# Altium PCB WIC-SWITCH-ESP32-POWER-CON.PcbDoc
Units mm, origin at the board's own origin, x right, y up, seen from the top; angles counter-clockwise.
Board outline 65 x 64 mm, 4 copper layers (Top Side, Inner Layer 1, Inner Layer 2, Bottom Side), stack 0.99 mm thick; 101 components, 46 nets, 310 pads, 0 vias.
Unrouted connection lines stored in the file: 201.
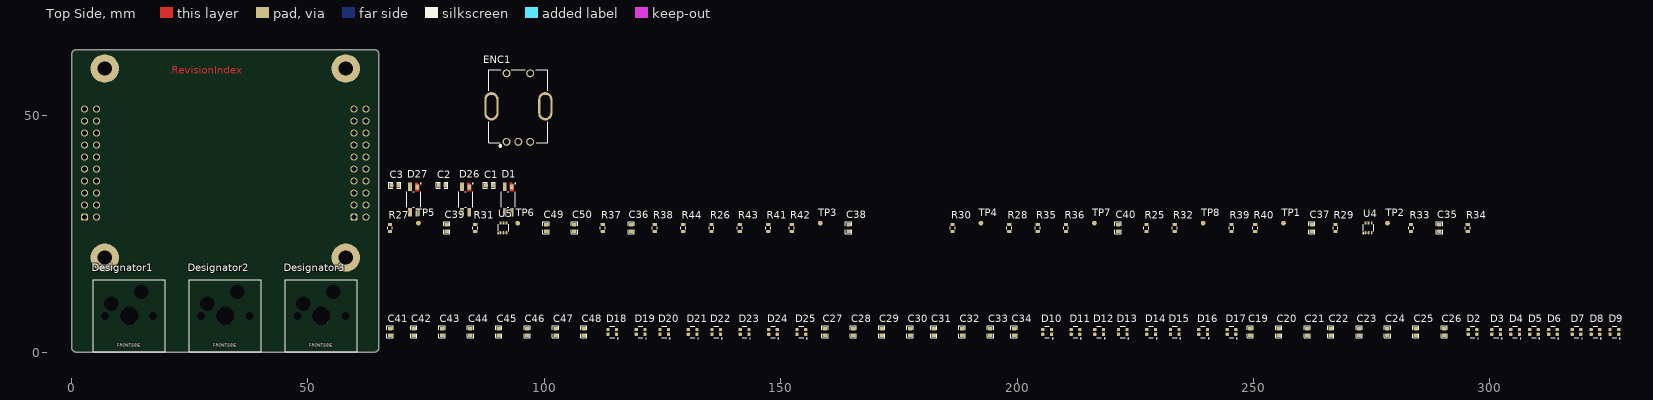
[diagram p0: Top Side view]
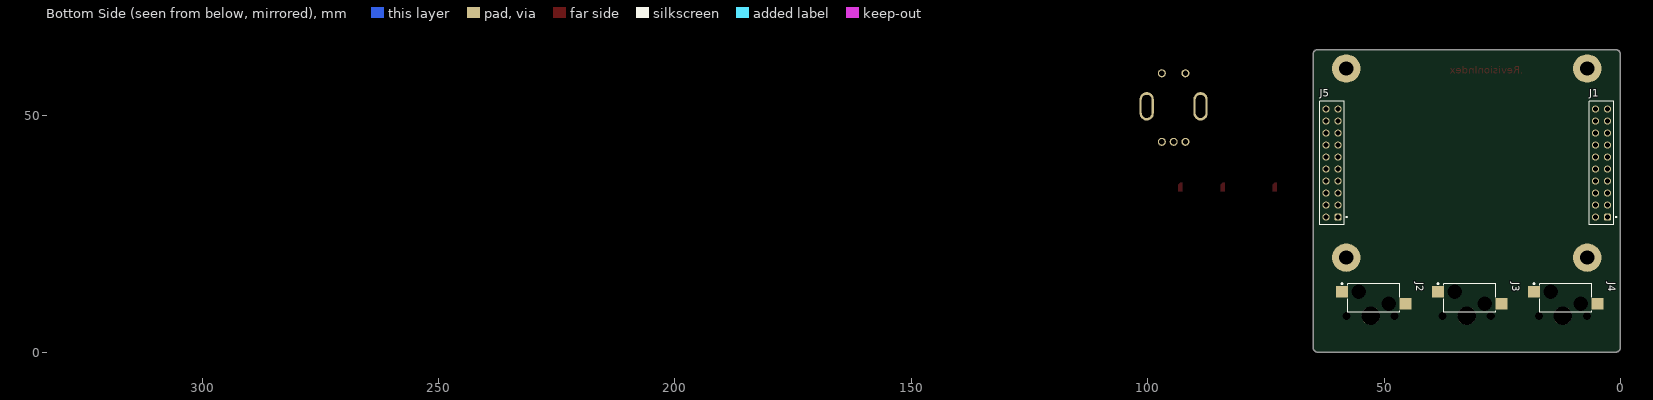
[diagram p1: Bottom Side view, seen from below]

## Layer stack, top to bottom
Top Solder: solder mask 0.015, WE-SM-0001, Dk 3.5
Top Side: signal copper 0.035
Dielectric 1: prepreg 0.22, WE-PP-0010, Dk 3.9
Inner Layer 1: signal copper 0.035
Core 1: core 0.41, WE-CO-0009, Dk 4.3
Inner Layer 2: signal copper 0.035
Dielectric 2: prepreg 0.22, WE-PP-0010, Dk 3.9
Bottom Side: signal copper 0.035
Bottom Solder: solder mask 0.015, WE-SM-0001, Dk 3.5

## Board outline
0,1 0,63 cw(c1,63) 1,64 64,64 cw(c64,63) 65,63 65,1 cw(c64,1) 64,0 1,0 cw(c1,1)

## Design rules (kind name [scope] priority, off if disabled: settings)
AssemblyTestPointUsage [All] p1: isadvanced=TRUE
AssemblyTestpoint [All] p1: isadvanced=TRUE testpointundercomponent=TRUE minsize=1.016 maxsize=2.54 preferedsize=1.524 minholesize=0 maxholesize=1.016 preferedholesize=0.813 testpointgrid=0.025 usegrid=TRUE gridtolerance=0 allowsidetop=TRUE allowsidebottom=TRUE
Clearance [All] p1: gap=0.254 ignorepadtopadclearanceinfootprint=FALSE ismatrix=TRUE
ComponentClearance [All] p1: isadvanced=TRUE gap=0.254 collisioncheckmode=3 verticalgap=0.254 showdistances=FALSE
FabricationTestPointUsage [All] p1: isadvanced=TRUE valid=0 allowmultiple=FALSE
FabricationTestpoint [All] p1: isadvanced=TRUE side=3 testpointundercomponent=TRUE minsize=1.016 maxsize=2.54 preferedsize=1.524 minholesize=0 maxholesize=1.016 preferedholesize=0.813 testpointgrid=0.025 allowsidetop=TRUE allowsidebottom=TRUE usegrid=TRUE gridtolerance=0
FanoutControl Fanout_BGA [IsBGA] p1: isadvanced=TRUE bgadir=Out bgaviamode=Centered fanoutstyle=Auto fanoutdirection=Alternating viagrid=0.025 // Fanout_BGA (Default Rule)
FanoutControl Fanout_LCC [IsLCC] p2: isadvanced=TRUE bgadir=Out bgaviamode=Centered fanoutstyle=Auto fanoutdirection=Alternating viagrid=0.025 // Fanout_LCC (Default Rule)
FanoutControl Fanout_SOIC [IsSOIC] p3: isadvanced=TRUE bgadir=Out bgaviamode=Centered fanoutstyle=Auto fanoutdirection=Alternating viagrid=0.025 // Fanout_SOIC (Default Rule)
FanoutControl Fanout_Small [(CompPinCount < 5)] p4: isadvanced=TRUE bgadir=Out bgaviamode=Centered fanoutstyle=Auto fanoutdirection=OutThenIn viagrid=0.025 // Fanout_Small (Default Rule)
FanoutControl Fanout_Default [All] p5: isadvanced=TRUE bgadir=Out bgaviamode=Centered fanoutstyle=Auto fanoutdirection=Alternating viagrid=0.025 // Fanout_Default (Default Rule)
Height [All] p1: isadvanced=TRUE minheight=0 maxheight=25.4 prefheight=12.7
HoleSize [All] p1: isadvanced=TRUE absolutevalues=TRUE maxlimit=3 minlimit=0.025 maxpercent=80.000 minpercent=20.000
HoleToHoleClearance [All] p1: isadvanced=TRUE gap=0.15 allowstackedmicrovias=TRUE
LayerPairs [All] p1: isadvanced=TRUE enforce=TRUE
MinimumSolderMaskSliver [All] p1: isadvanced=TRUE minsoldermaskwidth=0.1
NetAntennae [All] p1: isadvanced=TRUE netantennaetolerance=0
PasteMaskExpansion [All] p1: isadvanced=TRUE expansion=0 percent=-10.000000
PlaneClearance [All] p1: isadvanced=TRUE clearance=0.508
PlaneConnect [All] p1: isadvanced=TRUE planeconnectstyle=Relief reliefexpansion=0.508 reliefentries=4 reliefconductorwidth=0.254 reliefairgap=0.254
PolygonConnect [All] p1: connectstyle=Relief reliefconductorwidth=0.254 reliefentries=4 polygonreliefangle="90 Angle" airgapwidth=0.254
RoutingCorners [All] p1: isadvanced=TRUE cornerstyle=45-Degree minsetback=2.54 maxsetback=2.54
RoutingPriority [All] p1: isadvanced=TRUE routingpriority=0
RoutingVias [All] p1: holewidth=0.711 width=1.27 viastyle="Through Hole" minholewidth=0.711 minwidth=1.27 maxholewidth=0.711 maxwidth=1.27
ShortCircuit [All] p1: isadvanced=TRUE allowed=FALSE
SilkToSilkClearance [All] p1: isadvanced=TRUE silktosilkclearance=0.15
SilkToSolderMaskClearance [IsPad] p1: isadvanced=TRUE minsilkscreentomaskgap=0.15 clearancetoexposedcopper=TRUE
SolderMaskExpansion [All] p1: isadvanced=TRUE expansion=0.05 istentingtop=FALSE useseparateexpansions=TRUE expansionbottom=0.05 istentingbottom=FALSE
SupplyNets "Schematic Supply Nets_4" [InNet('5V_LEDS')] p1: voltage=0.000
SupplyNets "Schematic Supply Nets_2" [InNet('GND')] p2: isadvanced=TRUE voltage=0.000
SupplyNets "Schematic Supply Nets_1" [InNet('3V3')] p3: isadvanced=TRUE voltage=0.000
UnRoutedNet [All] p1: isadvanced=TRUE
UnpouredPolygon [All] p1: isadvanced=TRUE
Width [All] p1: maxlimit=0.254 minlimit=0.254 preferedwidth=0.254
4 further rules are at their usual default settings.

## Classes and differential pairs
component class B2B-CONNECTOR: J1 J5
component class "LEDs PUSH BUTTONS": C19 C20 C21 C22 C23 C24 C25 C26 C27 C28 C29 C30 C31 C32 C33 C34 C41 C42 C43 C44 C45 C46 C47 C48 D2 D3 D4 D5 D6 D7 D8 D9 D10 D11 D12 D13 D14 D15 D16 D17 D18 D19 D20 D21 D22 D23 D24 D25
component class "PUSH-BUTTON & ENCODER": C1 C2 C3 C35 C36 C37 C38 C39 C40 C49 C50 D1 D26 D27 ENC1 J2 J3 J4 R25 R26 R27 R28 R29 R30 R31 R32 R33 R34 R35 R36 R37 R38 R39 R40 R41 R42 R43 R44 S1 S2 S3 TP1 TP2 TP3 TP4 TP5 TP6 TP7 TP8 U4 U5

## Components (designator, comment, footprint, x,y, rotation, side; value= is the part's Value field where it differs from the comment)
C1 "C0603C104K5RACTU" CAPC0603X37L 88.362,35.293 r0 top value=100nF
C2 "C0603C104K5RACTU" CAPC0603X37L 78.362,35.293 r0 top value=100nF
C3 "C0603C104K5RACTU" CAPC0603X37L 68.362,35.293 r0 top value=100nF
C19 "C0603C104K5RACTU" CAPC0603X37L 249.362,4.293 r90 top value=100nF
C20 "C0603C104K5RACTU" CAPC0603X37L 255.362,4.293 r90 top value=100nF
C21 "C0603C104K5RACTU" CAPC0603X37L 261.362,4.293 r90 top value=100nF
C22 "C0603C104K5RACTU" CAPC0603X37L 266.362,4.293 r90 top value=100nF
C23 "C0603C104K5RACTU" CAPC0603X37L 272.362,4.293 r90 top value=100nF
C24 "C0603C104K5RACTU" CAPC0603X37L 278.362,4.293 r90 top value=100nF
C25 "C0603C104K5RACTU" CAPC0603X37L 284.362,4.293 r90 top value=100nF
C26 "C0603C104K5RACTU" CAPC0603X37L 290.362,4.293 r90 top value=100nF
C27 "C0603C104K5RACTU" CAPC0603X37L 159.362,4.293 r90 top value=100nF
C28 "C0603C104K5RACTU" CAPC0603X37L 165.362,4.293 r90 top value=100nF
C29 "C0603C104K5RACTU" CAPC0603X37L 171.362,4.293 r90 top value=100nF
C30 "C0603C104K5RACTU" CAPC0603X37L 177.362,4.293 r90 top value=100nF
C31 "C0603C104K5RACTU" CAPC0603X37L 182.362,4.293 r90 top value=100nF
C32 "C0603C104K5RACTU" CAPC0603X37L 188.362,4.293 r90 top value=100nF
C33 "C0603C104K5RACTU" CAPC0603X37L 194.362,4.293 r90 top value=100nF
C34 "C0603C104K5RACTU" CAPC0603X37L 199.362,4.293 r90 top value=100nF
C35 "C0603C104K5RACTU" CAPC0603X37L 289.362,26.293 r90 top value=100nF
C36 "C0603C104K5RACTU" CAPC0603X37L 118.362,26.293 r90 top value=100nF
C37 "C0603C104K5RACTU" CAPC0603X37L 262.362,26.293 r90 top value=100nF
C38 "C0603C104K5RACTU" CAPC0603X37L 164.362,26.293 r90 top value=100nF
C39 "C0603C104K5RACTU" CAPC0603X37L 79.362,26.293 r90 top value=100nF
C40 "C0603C104K5RACTU" CAPC0603X37L 221.362,26.293 r90 top value=100nF
C41 "C0603C104K5RACTU" CAPC0603X37L 67.362,4.293 r90 top value=100nF
C42 "C0603C104K5RACTU" CAPC0603X37L 72.362,4.293 r90 top value=100nF
C43 "C0603C104K5RACTU" CAPC0603X37L 78.362,4.293 r90 top value=100nF
C44 "C0603C104K5RACTU" CAPC0603X37L 84.362,4.293 r90 top value=100nF
C45 "C0603C104K5RACTU" CAPC0603X37L 90.362,4.293 r90 top value=100nF
C46 "C0603C104K5RACTU" CAPC0603X37L 96.362,4.293 r90 top value=100nF
C47 "C0603C104K5RACTU" CAPC0603X37L 102.362,4.293 r90 top value=100nF
C48 "C0603C104K5RACTU" CAPC0603X37L 108.362,4.293 r90 top value=100nF
C49 "C0603C103K5RACTU" CAPC0603X37L 100.362,26.293 r90 top value=10nF
C50 "C0603C103K5RACTU" CAPC0603X37L 106.362,26.293 r90 top value=10nF
D1 "SK6812MINI-E-012" OPSCO_SK6812MINI-E-012 92.362,32.293 r90 top value=SK6812MINI-E
D2 "WS2812B-2020" WS2812B-2020 296.362,4.293 r0 top
D3 "WS2812B-2020" WS2812B-2020 301.362,4.293 r0 top
D4 "WS2812B-2020" WS2812B-2020 305.362,4.293 r0 top
D5 "WS2812B-2020" WS2812B-2020 309.362,4.293 r0 top
D6 "WS2812B-2020" WS2812B-2020 313.362,4.293 r0 top
D7 "WS2812B-2020" WS2812B-2020 318.362,4.293 r0 top
D8 "WS2812B-2020" WS2812B-2020 322.362,4.293 r0 top
D9 "WS2812B-2020" WS2812B-2020 326.362,4.293 r0 top
D10 "WS2812B-2020" WS2812B-2020 206.362,4.293 r0 top
D11 "WS2812B-2020" WS2812B-2020 212.362,4.293 r0 top
D12 "WS2812B-2020" WS2812B-2020 217.362,4.293 r0 top
D13 "WS2812B-2020" WS2812B-2020 222.362,4.293 r0 top
D14 "WS2812B-2020" WS2812B-2020 228.362,4.293 r0 top
D15 "WS2812B-2020" WS2812B-2020 233.362,4.293 r0 top
D16 "WS2812B-2020" WS2812B-2020 239.362,4.293 r0 top
D17 "WS2812B-2020" WS2812B-2020 245.362,4.293 r0 top
D18 "WS2812B-2020" WS2812B-2020 114.362,4.293 r0 top
D19 "WS2812B-2020" WS2812B-2020 120.362,4.293 r0 top
D20 "WS2812B-2020" WS2812B-2020 125.362,4.293 r0 top
D21 "WS2812B-2020" WS2812B-2020 131.362,4.293 r0 top
D22 "WS2812B-2020" WS2812B-2020 136.362,4.293 r0 top
D23 "WS2812B-2020" WS2812B-2020 142.362,4.293 r0 top
D24 "WS2812B-2020" WS2812B-2020 148.362,4.293 r0 top
D25 "WS2812B-2020" WS2812B-2020 154.362,4.293 r0 top
D26 "SK6812MINI-E-012" OPSCO_SK6812MINI-E-012 83.362,32.293 r90 top value=SK6812MINI-E
D27 "SK6812MINI-E-012" OPSCO_SK6812MINI-E-012 72.362,32.293 r90 top value=SK6812MINI-E
Designator1 "Comment" KAILH_SWITCH_MX_COMPATIBEL 12.18,7.69 r0 top locked
Designator2 "Comment" KAILH_SWITCH_MX_COMPATIBEL 32.5,7.69 r0 top locked
Designator3 "Comment" KAILH_SWITCH_MX_COMPATIBEL 52.82,7.69 r0 top locked
ENC1 "PEC11R-4220K-S0024" PEC11R-4220K-S0024 94.5,52 r0 top value=PEC11R
J1 "61302021821" 61302021821 4,40 r90 bottom
J2 "CPG151101S11-16" KAILH_CPG151101S11-16 52.185,11.5 r180 bottom locked value=CPG151101S11
J3 "CPG151101S11-16" KAILH_CPG151101S11-16 31.865,11.5 r180 bottom locked value=CPG151101S11
J4 "CPG151101S11-16" KAILH_CPG151101S11-16 11.545,11.5 r180 bottom locked value=CPG151101S11
J5 "61302021821" 61302021821 61,40 r90 bottom
R25 "RC0603FR-070RL" RESC0603X21L 227.362,26.293 r90 top value=0
R26 "RC0603FR-070RL" RESC0603X21L 135.362,26.293 r90 top value=0
R27 "RC0603FR-070RL" RESC0603X21L 67.362,26.293 r90 top value=0
R28 "RC0603FR-070RL" RESC0603X21L 198.362,26.293 r90 top value=0
R29 "RC0603FR-070RL" RESC0603X21L 267.362,26.293 r90 top value=0
R30 "RC0603FR-070RL" RESC0603X21L 186.362,26.293 r90 top value=0
R31 "RC0603FR-070RL" RESC0603X21L 85.362,26.293 r90 top value=0
R32 "RC0603FR-070RL" RESC0603X21L 233.362,26.293 r90 top value=0
R33 "RC0603FR-0733KL" RESC0603X21L 283.362,26.293 r90 top value=10k
R34 "RC0603FR-0733KL" RESC0603X21L 295.362,26.293 r90 top value=10k
R35 "RC0603FR-0733KL" RESC0603X21L 204.362,26.293 r90 top value=10k
R36 "RC0603FR-0733KL" RESC0603X21L 210.362,26.293 r90 top value=10k
R37 "RC0603FR-0733KL" RESC0603X21L 112.362,26.293 r90 top value=10k
R38 "RC0603FR-0733KL" RESC0603X21L 123.362,26.293 r90 top value=10k
R39 "RC0603FR-0733KL" RESC0603X21L 245.362,26.293 r90 top value=10k
R40 "RC0603FR-0733KL" RESC0603X21L 250.362,26.293 r90 top value=10k
R41 "RC0603FR-0733KL" RESC0603X21L 147.362,26.293 r90 top value=10k
R42 "RC0603FR-0733KL" RESC0603X21L 152.362,26.293 r90 top value=10k
R43 "RC0603FR-0733KL" RESC0603X21L 141.362,26.293 r90 top value=10k
R44 "RC0603FR-0733KL" RESC0603X21L 129.362,26.293 r90 top value=10k
TP1 "SMD-Testpoint" "SMT-1.00mm Testpoint" 256.362,27.293 r90 top
TP2 "SMD-Testpoint" "SMT-1.00mm Testpoint" 278.362,27.293 r90 top
TP3 "SMD-Testpoint" "SMT-1.00mm Testpoint" 158.362,27.293 r90 top
TP4 "SMD-Testpoint" "SMT-1.00mm Testpoint" 192.362,27.293 r90 top
TP5 "SMD-Testpoint" "SMT-1.00mm Testpoint" 73.362,27.293 r90 top
TP6 "SMD-Testpoint" "SMT-1.00mm Testpoint" 94.362,27.293 r90 top
TP7 "SMD-Testpoint" "SMT-1.00mm Testpoint" 216.362,27.293 r90 top
TP8 "SMD-Testpoint" "SMT-1.00mm Testpoint" 239.362,27.293 r90 top
U4 "SN74LVC2G17DCKR" SOT23-6P65_200X210X110L36X22L 274.362,26.293 r0 top value=SN74LVC2G17
U5 "SN74LVC2G17DCKR" SOT23-6P65_200X210X110L36X22L 91.362,26.293 r0 top value=SN74LVC2G17

## Footprints (in the part's own frame and the unit in brackets; to place one, negate y for a bottom-side part, rotate by r counter-clockwise, add the part's x,y. Pads: shape width x height; smd on the part's side, far side on the other; paste and mask are expansions set on the pad)
61302021821 [mm] "Socket Header, Pitch 2.54 mm, THT, Vertical, dual row, 20p"
  rrect50% 1.5x1.5 hole 1.02: 1(-11.43,-1.27)
  round 1.5 hole 1.02: 2(-11.43,1.27) 3(-8.89,-1.27) 4(-8.89,1.27) 5(-6.35,-1.27) 6(-6.35,1.27) 7(-3.81,-1.27) 8(-3.81,1.27) 9(-1.27,-1.27) 10(-1.27,1.27) 11(1.27,-1.27) 12(1.27,1.27) 13(3.81,-1.27) 14(3.81,1.27) 15(6.35,-1.27) 16(6.35,1.27) 17(8.89,-1.27) 18(8.89,1.27) 19(11.43,-1.27) 20(11.43,1.27)
  silkscreen extent -13.08,-3.22 13.08,2.62, body extent -12.95,-2.54 12.95,2.54, height 8.45
CAPC0603X37L [mm] "Capacitor, Chip; 0603; 1.60 mm L X 0.80 mm W X 0.95 mm H body"
  rrect27% 0.75x0.95 smd: 1(-0.7,0) 2(0.7,0)
  silkscreen extent -1.25,-0.65 1.25,0.65, body extent -0.8,-0.4 0.8,0.4, height 0.95
KAILH_CPG151101S11-16 [mm] "Switch; 2 pin, 10.90 mm L X 5.89 mm W X 1.95 mm H body"
  rect 2.55x2.5 smd: 1(-6.725,1.27) 2(6.725,-1.27)
  round 1 hole 3 unplated paste-2539.97 mask+0: M1(-3.175,1.27) M2(3.175,-1.27)
  silkscreen extent -6.88,-3.01 5.51,3.15, body extent -7.25,-2.95 7.25,2.94, height 1.86
KAILH_SWITCH_MX_COMPATIBEL [mil] "Switch; 2 pin; MX Compatible"
  round 50 hole 67 unplated paste-99999 mask+0: 1(-200,0) 3(200,0)
  round 150 hole 157 unplated paste-99999 mask+0: 2(0,0)
  silkscreen extent -300,-300 300,300, body extent -275,-308 275,306, height 601
OPSCO_SK6812MINI-E-012 [mm] "LED; 4 pin, 3.20 mm L X 2.80 mm W X 1.04 mm H body"
  rect 0.98x0.82 smd paste-0.98 mask-0.98: 1(2.65,-0.75)
  rect 1.8x0.82 smd: 2(2.65,0.75) 3(-2.65,0.75) 4(-2.65,-0.75)
  Top Side region: 1.75,-1.16 1.75,-0.34 3.55,-0.34 3.55,-0.75 3.14,-1.16 1.75,-1.16
  silkscreen extent -1.66,-1.6 3.5,1.46, body extent -2.94,-1.4 2.94,1.4, height 1
PEC11R-4220K-S0024 [mm] "PEC11R Series-12mm Incremental Encoder"
  round 1.7 hole 1.1 paste-2539.97: 1(-2.5,7) 2(2.5,7) A(-2.5,-7.5) B(2.5,-7.5) C(0,-7.5)
  rrect100% 3x6 hole 2 slot 4.8 at 90 deg paste-2539.97: 3(-5.7,0) 4(5.7,0)
  silkscreen extent -6.25,-8.58 6.25,7.7, body extent -7,-7.7 7,7.22, height 26.51
RESC0603X21L [mm] "Resistor, Chip; 0603; 1.60 mm L X 0.80 mm W X 0.55 mm H body"
  rrect32% 0.62x0.9 smd: 1(-0.74,0) 2(0.74,0)
  silkscreen extent -0.25,-0.51 0.25,0.51, body extent -0.8,-0.4 0.8,0.4, height 0.55
"SMT-1.00mm Testpoint" [mm] "1.00mm Diameter"
  round 1 smd paste-2539.97: 1(0,0)
SOT23-6P65_200X210X110L36X22L [mm] "Small Outline Transistor, SOT-23 Type, 650 um pitch; 6 pin, 2000 um L X 1250 um W X 1100 um H body"
  rrect50% 0.36x0.65 smd: 1(-0.65,-1.025) 2(0,-1.025) 3(0.65,-1.025) 4(0.65,1.025) 5(0,1.025) 6(-0.65,1.025)
  silkscreen extent -1.25,-1.25 1.13,0.76, body extent -1,-1.05 1,1.05, height 1.1
WS2812B-2020 [mm] "Small Outline Transistor, SOT-23 Type, 0.95 mm pitch; 6 pin, 2.90 mm L X 1.60 mm W X 1.45 mm H body"
  rrect50% 0.7x0.7 smd: 1(0.915,-0.5) 2(0.915,0.5) 3(-0.915,0.5) 4(-0.915,-0.5)
  silkscreen extent -0.5,-1.5 1.24,1.2, body extent -1.1,-1 1.1,1, height 0.87

## Part data
C1 C2 C3 C19 C20 C21 C22 C23 C24 C25 C26 C27 C28 C29 C30 C31 C32 C33 C34 C35 C36 C37 C38 C39 C40 C41 C42 C43 C44 C45 C46 C47 C48: library part CMP-00094-12, "CAPACITOR 100 nF 0603 X7R 50V 10%", Case/Package=0603, Dielectric=X7R, Manufacturer 1=Kemet, Operating Temperature (max)=125°C, Operating Temperature (min)=-55°C, Tolerance=10%, Voltage=50V, Comment Designer="can be substituted same values other manufacturer", Manufacturer 1 Part Number=C0603C104K5RACTU
C49 C50: library part CMP-00082-12, "CAPACITOR 10 nF 0603 X7R 50V 10%", Case/Package=0603, Dielectric=X7R, Manufacturer 1=Kemet, Operating Temperature (max)=125°C, Operating Temperature (min)=-55°C, Tolerance=10%, Voltage=50V, Comment Designer="can be substituted same values other manufacturer", Manufacturer 1 Part Number=C0603C103K5RACTU
D1 D26 D27: library part CMP-00204-03, "SMD RGB LEDs(Built-in IC) ROHS  - Reverse Mount", Case/Package=2020, Color=RGB, Manufacturer 1="OPSCO Optoelectronics", Operating Temperature (max)=85°C, Operating Temperature (min)=-40°C, Voltage=5V, Manufacturer 1 Part Number=SK6812MINI-E-012
D2 D3 D4 D5 D6 D7 D8 D9 D10 D11 D12 D13 D14 D15 D16 D17 D18 D19 D20 D21 D22 D23 D24 D25: library part CMP-00193-01, "LED", Case/Package=2020, Color=RGB, Manufacturer 1=Worldsemi, Operating Temperature (max)=85°C, Operating Temperature (min)=-25°C, Voltage=5V, Manufacturer 1 Part Number=WS2812B-2020
ENC1: library part CMP-00197-03, "Rotary Position Encoder", Manufacturer 1=Bourns, Operating Temperature (max)=70°C, Operating Temperature (min)=-30°C, Voltage=5V, Manufacturer 1 Part Number=PEC11R-4220K-S0024
J1 J5: library part CMP-1502-01350-3, Contact Resistance=20mΩ, Current Rating=3A, Operating Supply Voltage=250V, Gender=Female, Lead Pitch=2.54mm, NexarPartId=61924746, Number of Pins=20, Orientation=Vertical, RoHS=Non-Compliant, System=Connector
J2 J3 J4: library part CMP-00191-06, "Socket PG1511 KeySwitches Contact Ⅲ (MX Series Cherry)", Case/Package="PG1511 14.65mm X 5.99mm", Manufacturer 1="DONGGUAN CITY KAIHUA ELECTRONICS", Operating Temperature (max)=125°C, Operating Temperature (min)=-55°C, Rated Current=10mA, Voltage=12V, Comment Designer="Clone of Cerry MX Series", ComponentLink1Description=Information, ComponentLink1URL=https://deskthority.net/wiki/Kailh_PG1511_series, Manufacturer 1 Part Number=CPG151101S11-16
R25 R26 R27 R28 R29 R30 R31 R32: library part CMP-009-00178-12, "RESISTOR 0R 1% 0603 100mW", Case/Package=0603, Manufacturer 1=Yageo, Operating Temperature (max)=125°C, Operating Temperature (min)=-55°C, Power=100mW, Tolerance=1%, Comment Designer="can be substituted same values other manufacturers", Manufacturer 1 Part Number=RC0603FR-070RL
R33 R34 R35 R36 R37 R38 R39 R40 R41 R42 R43 R44: library part CMP-009-00319-12, "RESISTOR 33K 1% 0603 100mW", Case/Package=0603, Manufacturer 1=Yageo, Operating Temperature (max)=125°C, Operating Temperature (min)=-55°C, Power=100mW, Tolerance=1%, Comment Designer="can be substituted same values other manufacturers", Manufacturer 1 Part Number=RC0603FR-0733KL
TP1 TP2 TP3 TP4 TP5 TP6 TP7 TP8: library part CMP-00196-01, "SMT-TESTPOINT", Case/Package="1.00mm DIA"
U4 U5: library part CMP-00194-01, "SN74LVC2G17 Dual Schmitt-Trigger Buffer", Case/Package=SOT-23, Manufacturer 1="Texas Instruments", Max Supply Voltage=5.5V, Min Supply Voltage=1.65V, Operating Temperature (max)=125°C, Operating Temperature (min)=-40°C, Manufacturer 1 Part Number=SN74LVC2G17DCKR, PartId=1, Prop. Delay@Nom-Sup=5.4ns, Type="Schmitt Trigger"

## Free pads (board coordinates)
  round 6 hole 3: MH1(7,20) MH2(58,20) MH3(58,60) MH4(7,60)

## Nets (pads, with @x,y where several pads share a name; then routed paths per layer and width w, separated by ;. In a path a pad name is that pad's centre, name@x,y a point inside that pad or via, vN(x,y) a via of type N, cw(c..) or ccw(c..) an arc to the next point about the centre after c; other vN are vias at no path point)
3V3: C35.1 C36.1 R33.1 R34.1 R35.1 R36.1 R37.1 R38.1 R39.1 R40.1 R41.1 R42.1 U4.5 U5.5
5V_LEDS: C1.1 C2.1 C3.1 C19.1 C20.1 C21.1 C22.1 C23.1 C24.1 C25.1 C26.1 C27.1 C28.1 C29.1 C30.1 C31.1 C32.1 C33.1 C34.1 C41.1 C42.1 C43.1 C44.1 C45.1 C46.1 C47.1 C48.1 D1.3 D2.4 D3.4 D4.4 D5.4 D6.4 D7.4 D8.4 D9.4 D10.4 D11.4 D12.4 D13.4 D14.4 D15.4 D16.4 D17.4 D18.4 D19.4 D20.4 D21.4 D22.4 D23.4 D24.4 D25.4 D26.3 D27.3
ENCODER_A: C49.2 R43.2
ENCODER_B: C50.2 R44.2
ENCODER_SW: C40.2 R32.2 TP8.1
GND: C1.2 C2.2 C3.2 C19.2 C20.2 C21.2 C22.2 C23.2 C24.2 C25.2 C26.2 C27.2 C28.2 C29.2 C30.2 C31.2 C32.2 C33.2 C34.2 C35.2 C36.2 C37.1 C38.1 C39.1 C40.1 C41.2 C42.2 C43.2 C44.2 C45.2 C46.2 C47.2 C48.2 C49.1 C50.1 D1.1 D2.2 D3.2 D4.2 D5.2 D6.2 D7.2 D8.2 D9.2 D10.2 D11.2 D12.2 D13.2 D14.2 D15.2 D16.2 D17.2 D18.2 D19.2 D20.2 D21.2 D22.2 D23.2 D24.2 D25.2 D26.1 D27.1 ENC1.2 ENC1.3 ENC1.4 ENC1.C J2.1 J3.1 J4.1 U4.2 U5.2
KEYS-LEDS-1<>2: D1.4 D26.2
KEYS-LEDS-2<>3: D26.4 D27.2
KEYS-LEDS-IN: D1.2
NetENC1_1: ENC1.1 R28.1 R39.2 TP7.1 U5.3
NetENC1_A: ENC1.A R41.2 R43.1
NetENC1_B: ENC1.B R42.2 R44.1
NetJ2_2: J2.2 R25.1 R33.2 TP1.1 U4.1
NetJ3_2: J3.2 R26.1 R35.2 TP3.1 U4.3
NetJ4_2: J4.2 R27.1 R37.2 TP5.1 U5.1
NetR25_2: R25.2 R29.1 R34.2 U4.6
NetR26_2: R26.2 R30.1 R36.2 U4.4
NetR27_2: R27.2 R31.1 R38.2 U5.6
NetR28_2: R28.2 R32.1 R40.2 U5.4
P1L0: D2.3
P1L1: D2.1 D3.3
P1L2: D3.1 D4.3
P1L3: D4.1 D5.3
P1L4: D5.1 D6.3
P1L5: D6.1 D7.3
P1L6: D7.1 D8.3
P1L7: D8.1 D9.3
P2L0: D10.3
P2L1: D10.1 D11.3
P2L2: D11.1 D12.3
P2L3: D12.1 D13.3
P2L4: D13.1 D14.3
P2L5: D14.1 D15.3
P2L6: D15.1 D16.3
P2L7: D16.1 D17.3
P3L0: D18.3
P3L1: D18.1 D19.3
P3L2: D19.1 D20.3
P3L3: D20.1 D21.3
P3L4: D21.1 D22.3
P3L5: D22.1 D23.3
P3L6: D23.1 D24.3
P3L7: D24.1 D25.3
"PUSH-BUTTON 1": C37.2 R29.2 TP2.1
"PUSH-BUTTON 2": C38.2 R30.2 TP4.1
"PUSH-BUTTON 3": C39.2 R31.2 TP6.1
pads on no net: D9.1 D17.1 D25.1 D27.4 Designator1.1 Designator1.2 Designator1.3 Designator2.1 Designator2.2 Designator2.3 Designator3.1 Designator3.2 Designator3.3 J1.1 J1.2 J1.3 J1.4 J1.5 J1.6 J1.7 J1.8 J1.9 J1.10 J1.11 J1.12 J1.13 J1.14 J1.15 J1.16 J1.17 J1.18 J1.19 J1.20 J2.M1 J2.M2 J3.M1 J3.M2 J4.M1 J4.M2 J5.1 J5.2 J5.3 J5.4 J5.5 J5.6 J5.7 J5.8 J5.9 J5.10 J5.11 J5.12 J5.13 J5.14 J5.15 J5.16 J5.17 J5.18 J5.19 J5.20

## Other copper
Top Side:
  text ".RevisionIndex" at 20.597,58.902 h1.52

## Silkscreen, mask and mechanical layers (free items; w line width, h text height)
Board Shape:
  lines w0.4: 1,64 ccw(c1,63) 0,63 0,1 ccw(c1,1) 1,0 64,0 ccw(c64,1) 65,1 65,63 ccw(c64,63) 64,64 1,64 ; 1,64 1,64

## Text inside footprints (layer, text, board x,y; h text height)
Designator1: Top Overlay "FRONTSIDE" at 9.631,1.148 h0.6; Top Assembly "LED-CENTER" at 12.661,4.615 h0.6
Designator2: Top Overlay "FRONTSIDE" at 29.951,1.148 h0.6; Top Assembly "LED-CENTER" at 32.981,4.615 h0.6
Designator3: Top Overlay "FRONTSIDE" at 50.271,1.148 h0.6; Top Assembly "LED-CENTER" at 53.301,4.615 h0.6